# Altium PCB car_template 2021V3.PcbDoc
Units mm, origin at the board's own origin, x right, y up, seen from the top; angles counter-clockwise.
Board outline 64 x 85 mm, 4 copper layers (Top Side, Ground Plane, Power Plane, Bottom Side), stack 0.844 mm thick; 109 components, 84 nets, 330 pads, 13 vias.
Unrouted connection lines stored in the file: 162.
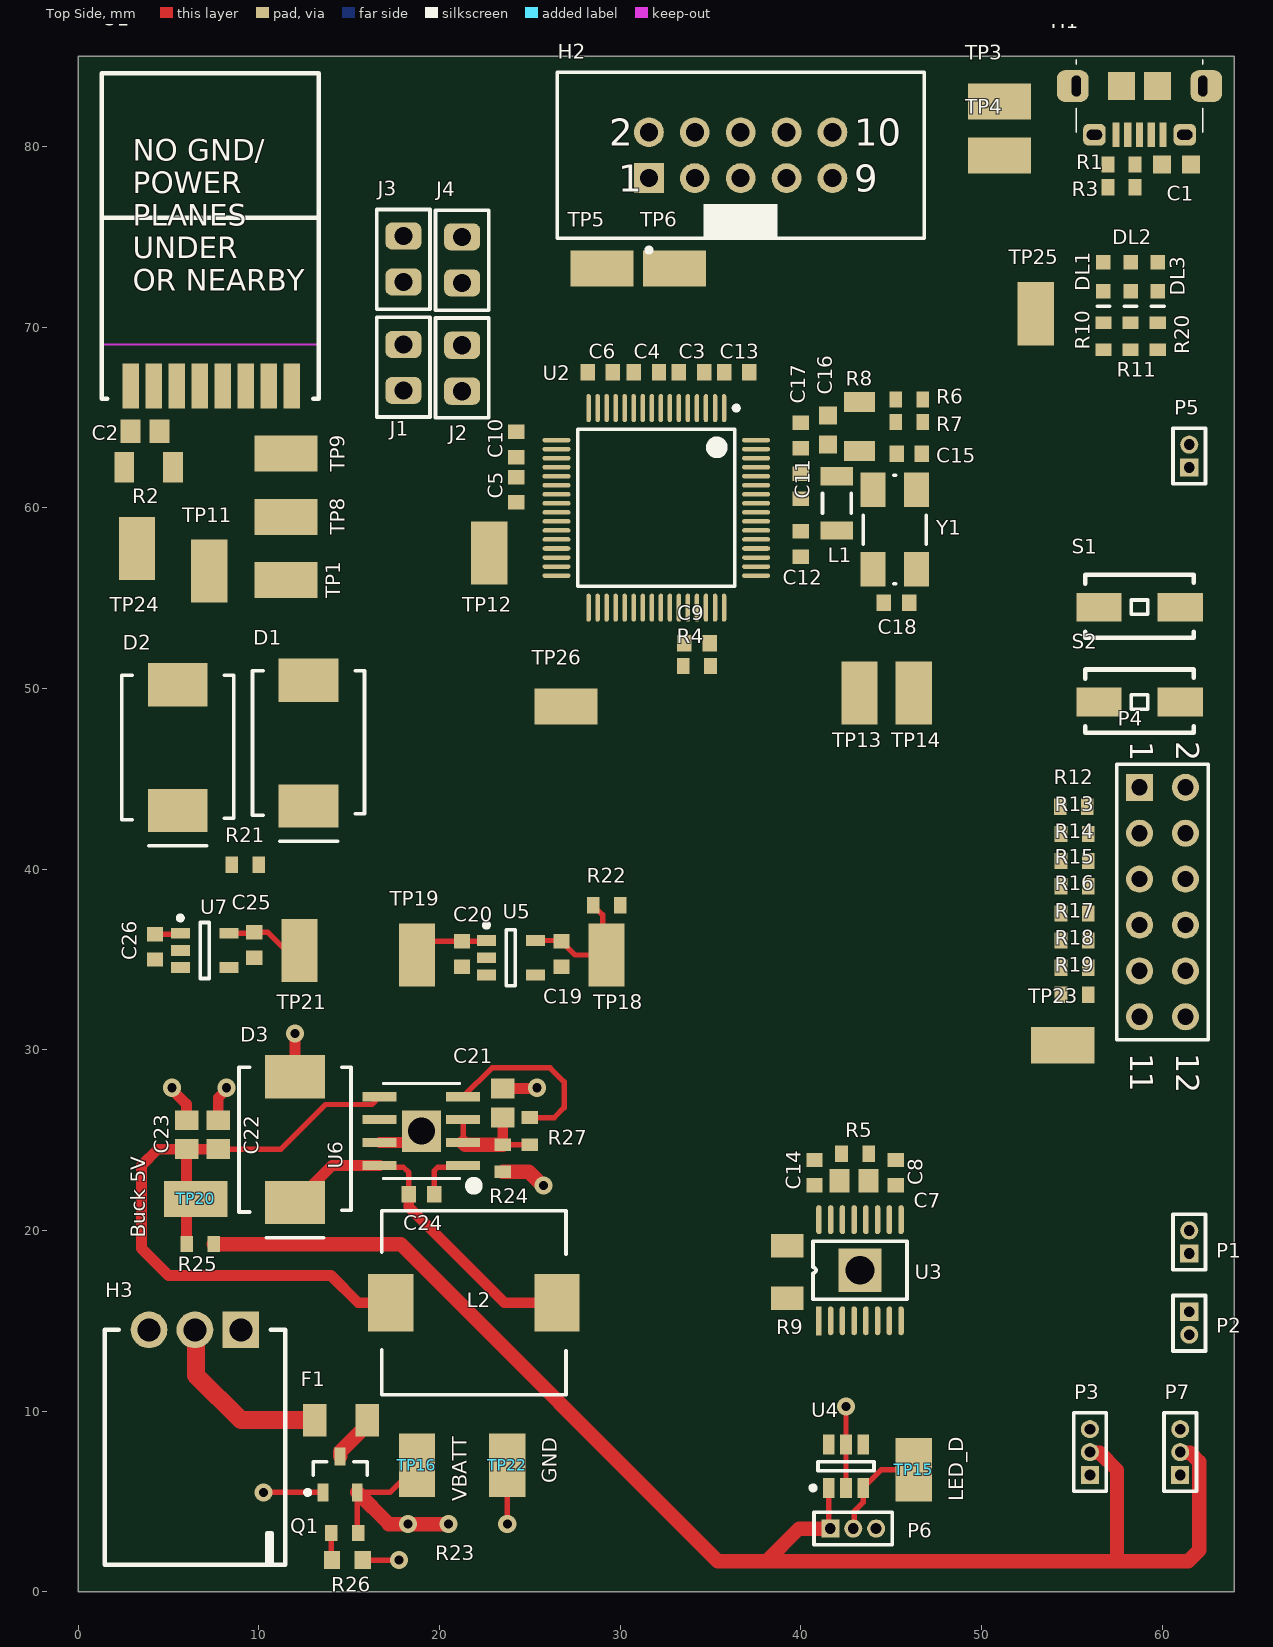
[diagram p0: Top Side view]
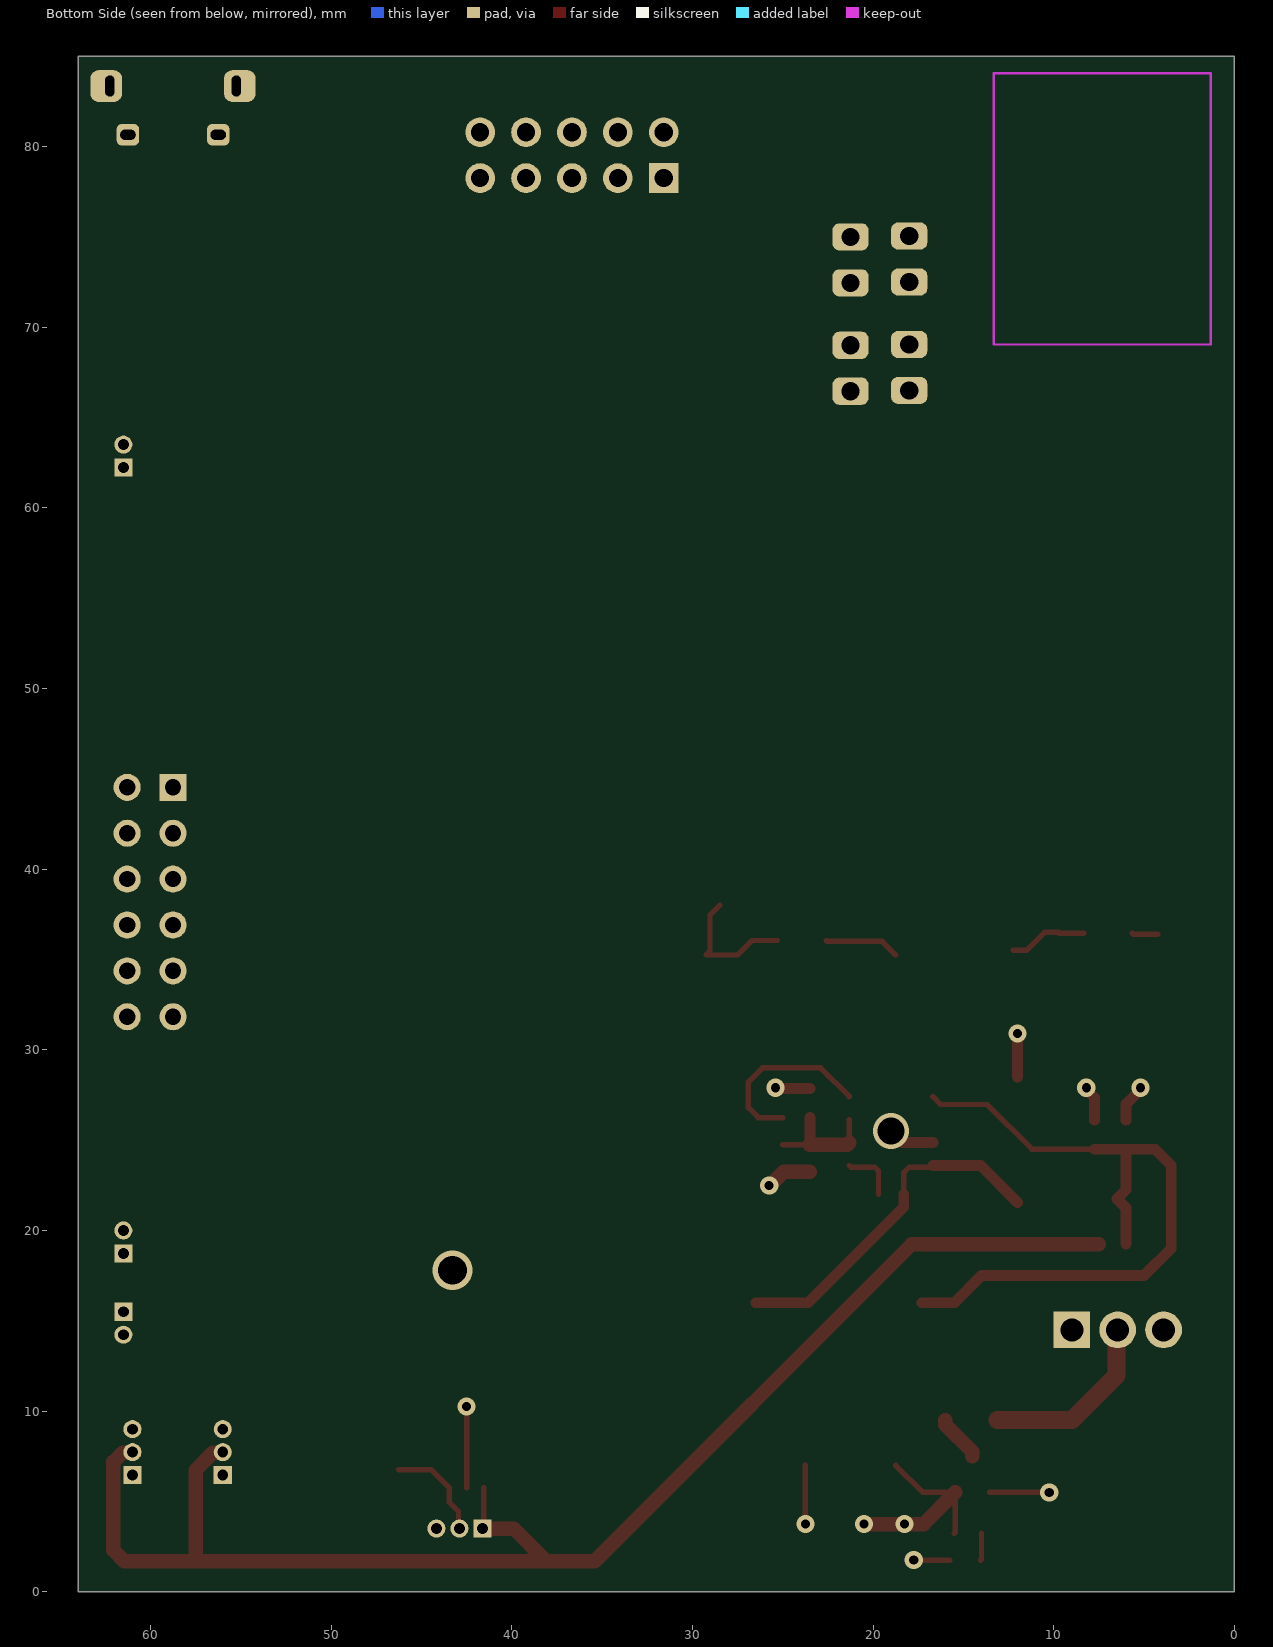
[diagram p1: Bottom Side view, seen from below]
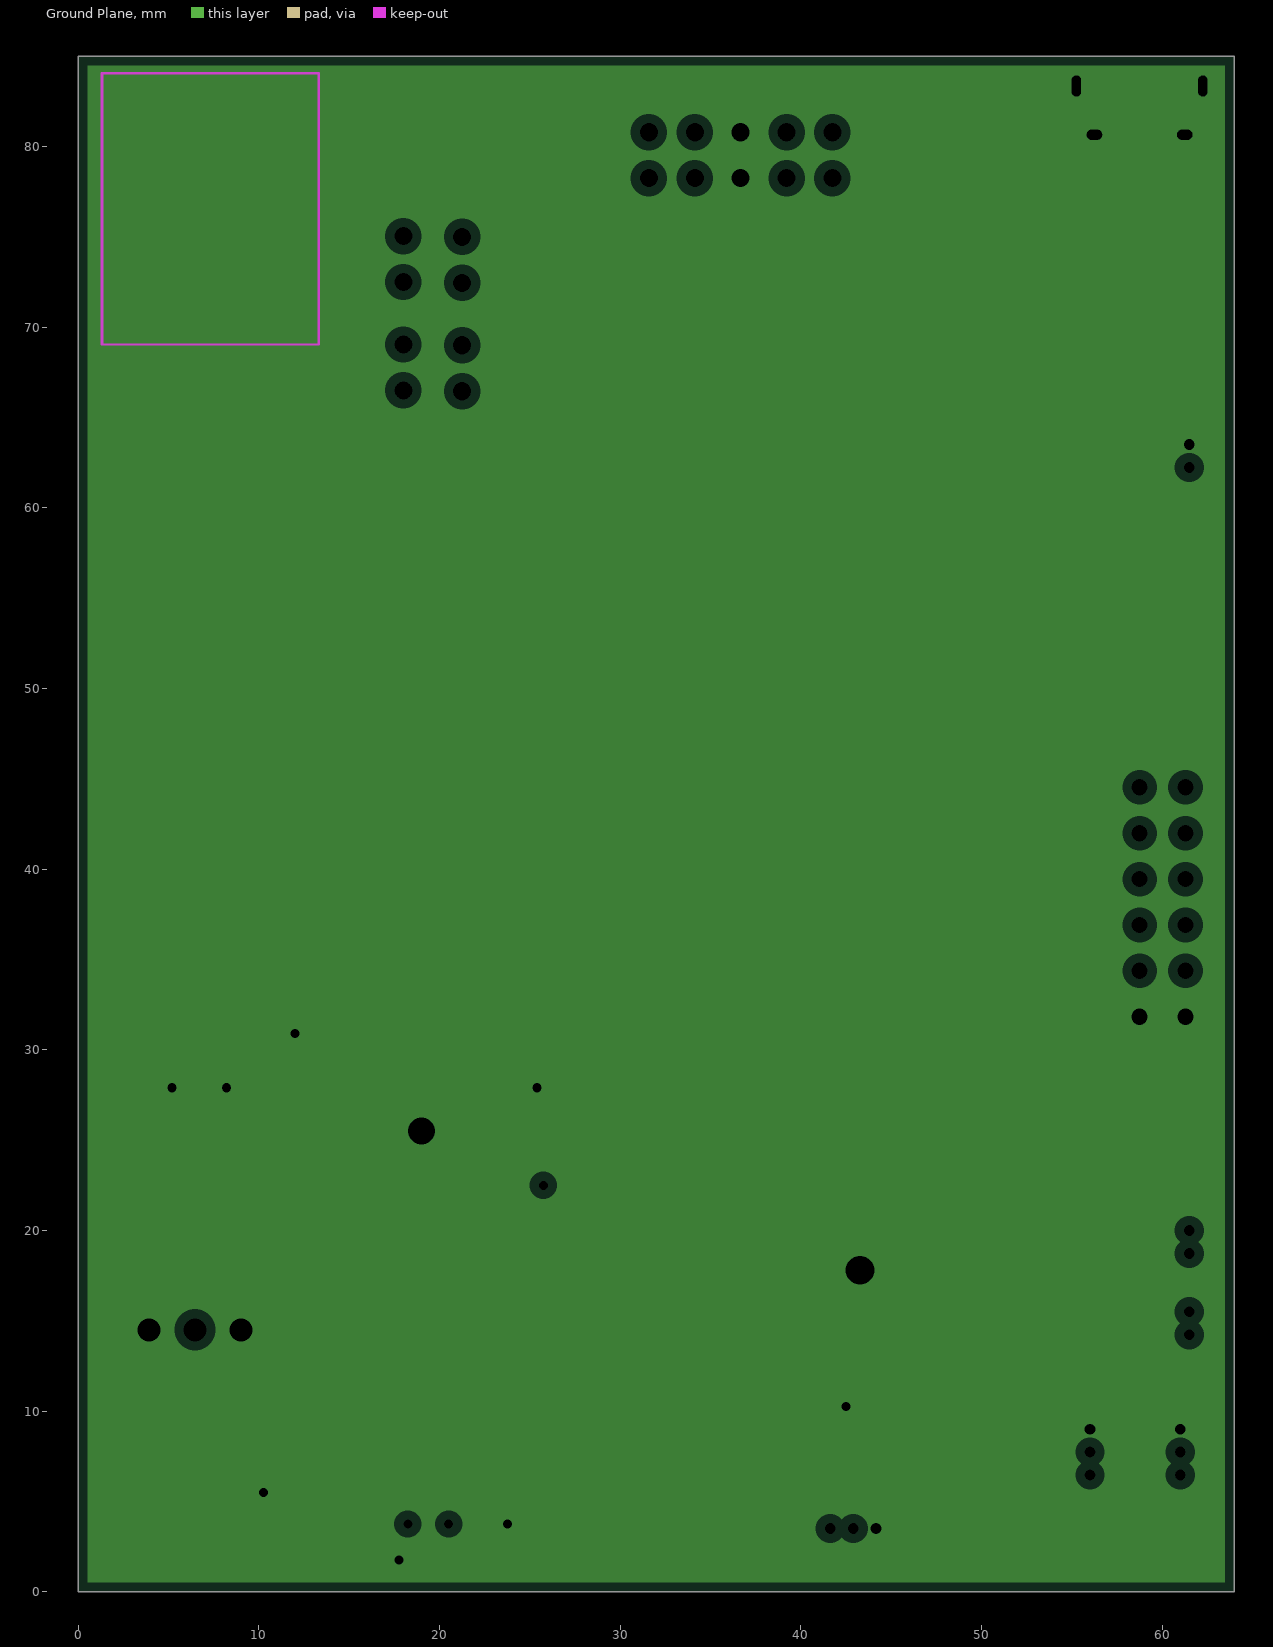
[diagram p2: Ground Plane, clearances drawn from the general rule]
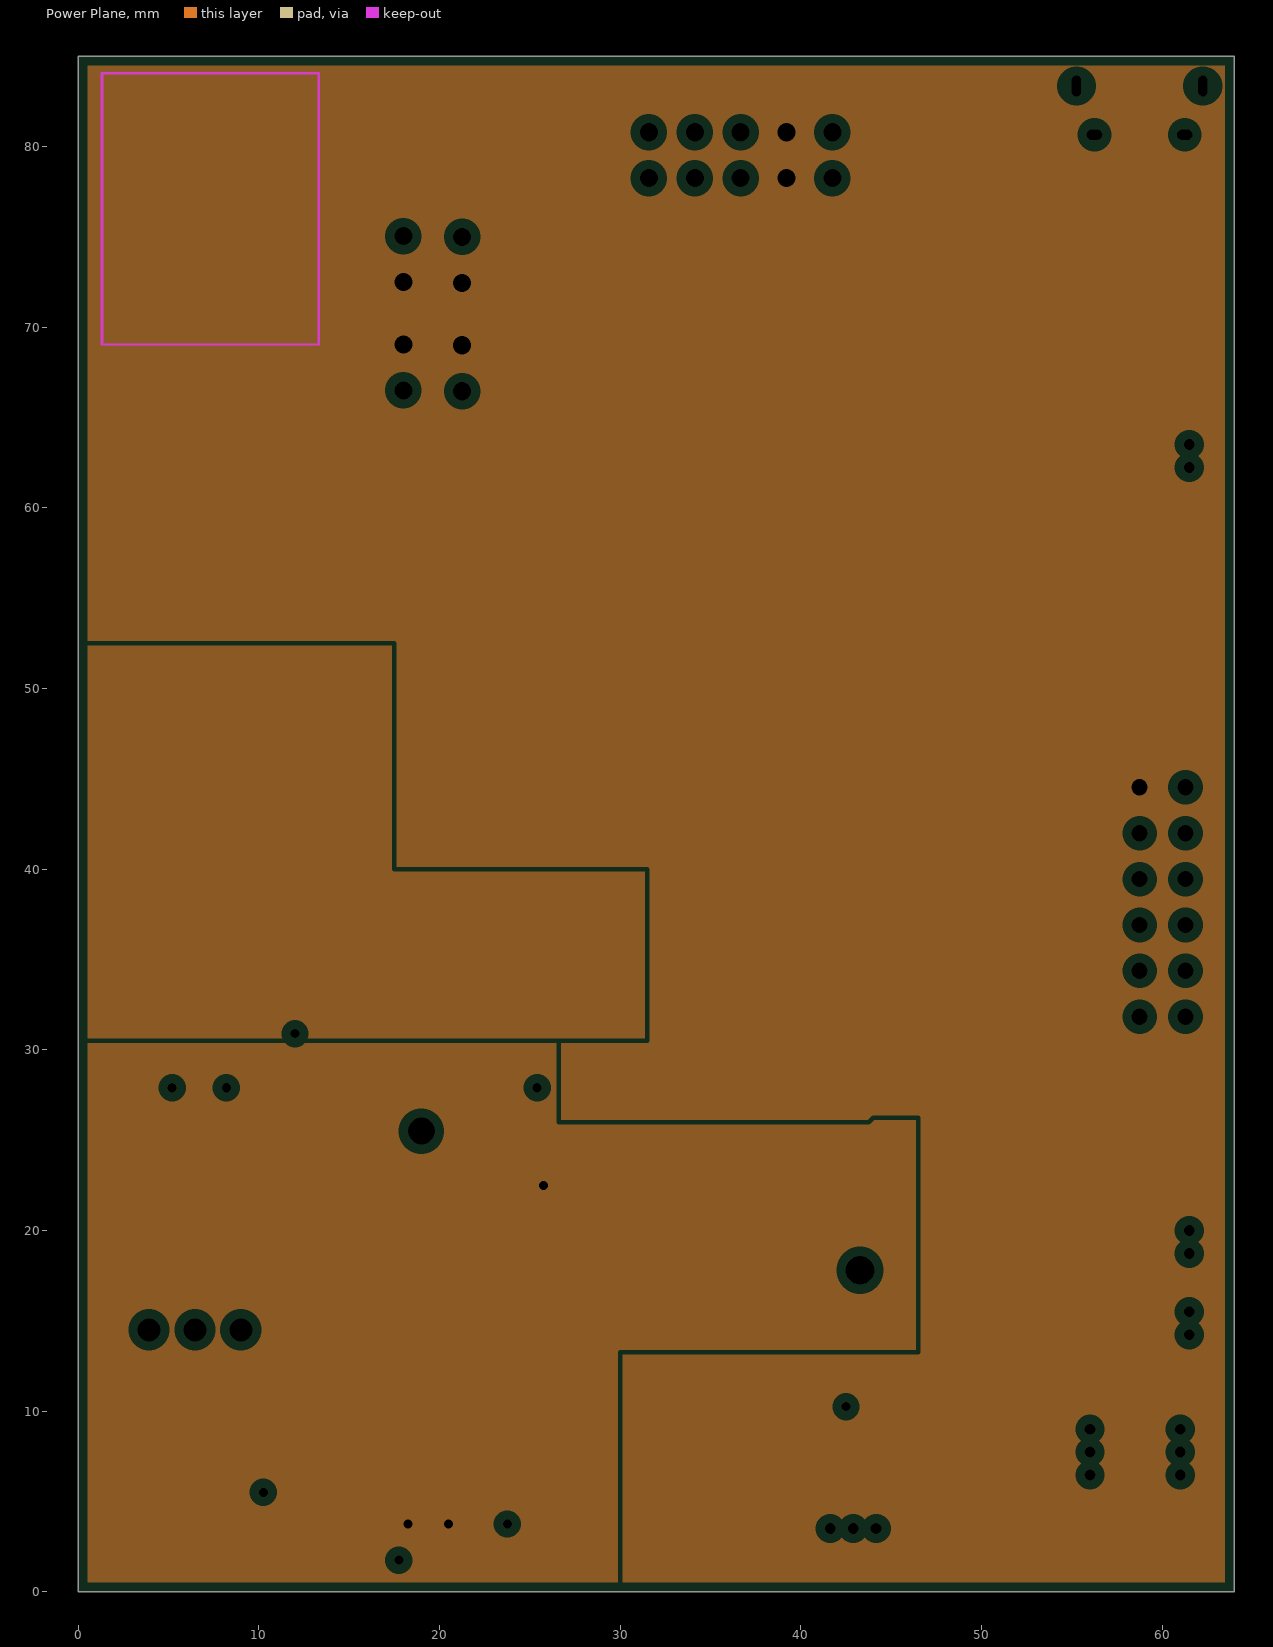
[diagram p3: Power Plane, clearances drawn from the general rule]

## Layer stack, top to bottom
Top Solder: solder mask 0.0102, Solder Resist, Dk 3.5
Top Side: signal copper 0.0356
Dielectric 1: core 0.32, FR-4, Dk 4.8
Ground Plane: plane copper 0.036, net GND
Dielectric 3: prepreg 0.127, Dk 4.2
Power Plane: plane copper 0.036, net 3V3
Dielectric 4: core 0.254, Dk 4.2
Bottom Side: signal copper 0.0356
Bottom Solder: solder mask 0.0102, Solder Resist, Dk 3.5

## Board outline
0,85 64,85 64,0 0,0 0,85

## Design rules (kind name [scope] priority, off if disabled: settings)
BoardOutlineClearance [All] p1: gap=0.5 ignorepadtopadclearanceinfootprint=FALSE
Clearance Min_Clearance_Circuit_Labs [All] p1: gap=0.15 ignorepadtopadclearanceinfootprint=FALSE except(0: Arc-Hole Track-Hole SMDPad-Hole THPad-Hole Via-Hole Fill-Hole Poly-Hole Region-Hole Text-Hole)
DiffPairsRouting [All] p1: maxlimit=0.254 minlimit=0.254 mostfreqgap=0.254 toplayer_minwidth=0.381 toplayer_maxwidth=0.381 toplayer_prefwidth=0.381 bottomlayer_minwidth=0.381 bottomlayer_maxwidth=0.381 bottomlayer_prefwidth=0.381 maxuncoupledlength=12.7
FanoutControl Fanout_BGA [IsBGA] p1 off: bgadir=Out bgaviamode=Centered fanoutstyle=Auto fanoutdirection=Alternating viagrid=0.025 // Fanout_BGA (Default Rule)
HoleSize [All] p1: absolutevalues=TRUE maxlimit=10 minlimit=0.3 maxpercent=80.000 minpercent=20.000
MinimumAnnularRing [All] p1: minimumring=0.1
MinimumSolderMaskSliver [All] p1: minsoldermaskwidth=0.1
NetAntennae [All] p1: netantennaetolerance=1
PasteMaskExpansion [All] p1 off: expansion=0.2
PlaneClearance [All] p1: clearance=0.508
PlaneConnect [All] p1: planeconnectstyle=Relief reliefexpansion=0.508 reliefentries=4 reliefconductorwidth=0.254 reliefairgap=0.254
PolygonConnect [All] p1: connectstyle=Relief reliefconductorwidth=0.254 reliefentries=4 polygonreliefangle="90 Angle" airgapwidth=0.254
RoutingVias [All] p1: holewidth=0.5 width=1 viastyle="Through Hole" minholewidth=0.3 minwidth=0.6 maxholewidth=1 maxwidth=2
SMDNeckDown [All] p1 off: percent=50.000
SMDToCorner [All] p1: distance=98425
SMDToPlane [All] p1: distance=1968504
SilkToSolderMaskClearance SilkscreenOverComponentPads [IsPad] p1: minsilkscreentomaskgap=0.254 clearancetoexposedcopper=TRUE
SolderMaskExpansion [All] p1: expansion=0.102
ViasUnderSMD [All] p1: allowed=FALSE
Width [All] p1: maxlimit=2 minlimit=0.15 preferedwidth=0.3
21 further rules are at their usual default settings.

## Classes and differential pairs
component class "Power Management": C19 C20 C21 C22 C23 C24 C25 C26 D1 D2 D3 F1 H3 L2 Q1 R21 R22 R23 R24 R25 R26 R27 TP16 TP18 TP19 TP20 TP21 TP22 TP23 TP24 TP25 TP26 U5 U6 U7
component class MCU: C1 C2 C3 C4 C5 C6 C7 C8 C9 C10 C11 C12 C13 C14 C15 C16 C17 C18 DL1 DL2 DL3 H1 H2 J1 J2 J3 J4 L1 P1 P2 P3 P4 P5 P6 P7 R1 R2 R3 R4 R5 R6 R7 R8 R9 R10 R11 R12 R13 R14 R15 R16 R17 R18 R19 R20 S1 S2 TP1 TP3 TP4 TP5 TP6 TP8 TP9 TP11 TP12 TP13 TP14 TP15 U1 U2 U3 U4 Y1
differential pair D: +D_P -D_N

## Components (designator, comment, footprint, x,y, rotation, side; value= is the part's Value field where it differs from the comment)
C1 "4.7uF" CAPC1608N 60.8,79 r180 top
C2 "10uF" CAPC2012L 3.7,64.25 r180 top
C3 "100nF" CAPC1608L 33.95,67.5 r180 top
C4 "100nF" CAPC1608L 31.45,67.5 r180 top
C5 "100nF" CAPC1608L 24.25,63.5 r270 top
C6 "100nF" CAPC1608L 28.9,67.5 r180 top
C7 "10uF" CAPC2012L 42.95,22.75 r0 top
C8 "10nF" CAPC1608L 45.25,23.2 r90 top
C9 "100nF" CAPC1608L 34.25,52.5 r180 top
C10 "100nF" CAPC1608L 24.25,61 r90 top
C11 "100nF" CAPC1608L 40,61.2 r270 top
C12 "100nF" CAPC1608L 40,58 r270 top
C13 "100nF" CAPC1608L 36.45,67.5 r0 top
C14 "2.2uF" CAPC1608L 40.75,23.2 r90 top
C15 "27pF" CAPC1608L 46,63 r0 top
C16 "4.7uF" CAPC1608N 41.5,64.3 r270 top
C17 "100nF" CAPC1608L 40,64 r270 top
C18 "27pF" CAPC1608L 45.3,54.75 r0 top
C19 "1uF" CAPC1608L 26.75,35.3 r90 top
C20 "1uF" CAPC1608L 21.25,35.3 r90 top
C21 "10uF" CAPC2012L 23.5,27.05 r270 top
C22 "33uF" CAPC2012L 7.75,25.3 r270 top
C23 "33uF" CAPC2012L 6,25.3 r270 top
C24 "100nF" CAPC1608L 19,22 r180 top
C25 "1uF" CAPC1608L 9.75,35.8 r90 top
C26 "1uF" CAPC1608L 4.25,35.7 r90 top
D1 "VS-30BQ015-M3/9AT" SMC 12.75,46.975 r270 top
D2 "VS-30BQ015-M3/9AT" SMC 5.5,46.725 r270 top
D3 "VS-30BQ015-M3/9AT" SMC 12,25.025 r270 top
DL1 "Yellow" WL-SMCW0603 56.75,72 r90 top
DL2 "Blue" WL-SMCW0603 58.25,72 r90 top
DL3 "Red" WL-SMCW0603 59.75,72 r90 top
F1 "5A" RESC3216N 14.55,9.5 r0 top
H1 "JS_USB_MICRO_B" FCI_USB_10118194-0001LF 58.75,84.8 r180 top
H2 "Header 5X2 Vert" IDC2.54-V10D 36.67,79.52 r0 top
H3 "Battery In" BATT_HEADER_3POS 6.46,14.5 r180 top
J1 "100Mil Jumper" JMP2.54 18,66.5 r90 top
J2 "100Mil Jumper" JMP2.54 21.25,66.456 r90 top
J3 "100Mil Jumper" JMP2.54 18,75.044 r270 top
J4 "100Mil Jumper" JMP2.54 21.25,75 r270 top
L1 "1A max, Idc 0.3R," INDC3216L 42,60.25 r270 top
L2 "IND 5.2UH 6A" INDUCTOR5u2 21.9,16 r180 top
P1 "Motor 1" MHDR1X2 61.5,18.73 r90 top
P2 "Motor 2" MHDR1X2 61.5,15.5 r270 top
P3 "Servo 1" MHDR1X3 56,6.46 r90 top
P4 "Header 6X2" HDR2X6 58.75,44.53 r270 top
P5 "Bumper" MHDR1X2 61.5,62.23 r90 top
P6 "LED Strip" MHDR1X3 41.63,3.5 r0 top
P7 "Servo 2" MHDR1X3 61,6.46 r90 top
Q1 "SSM3J328R,LF" SOT23_L 14.5,6.5 r90 top
R1 "27K" RESC1608L 57.75,79 r0 top
R2 "1R" RESC3216L 3.9,62.25 r0 top
R3 "47K" RESC1608L 57.75,77.75 r180 top
R4 "0R" RESC1608L 34.25,51.25 r0 top
R5 "0R" RESC1608L 43,24.25 r0 top
R6 "27R" RESC1608L 46,66 r180 top
R7 "27R" RESC1608L 46,64.75 r180 top
R8 "1R" RESC3216L 43.25,64.5 r90 top
R9 "25mR" RESC3216N 39.25,17.7 r270 top
R10 "1K" RESC1608L 56.75,69.5 r90 top
R11 "100R" RESC1608L 58.25,69.5 r270 top
R12 "750R" RESC1608L 55.1,43.45 r0 top
R13 "750R" RESC1608L 55.15,41.95 r180 top
R14 "750R" RESC1608L 55.15,40.45 r0 top
R15 "750R" RESC1608L 55.15,39.05 r180 top
R16 "750R" RESC1608L 55.15,37.55 r0 top
R17 "750R" RESC1608L 55.15,36.05 r180 top
R18 "750R" RESC1608L 55.15,34.55 r0 top
R19 "750R" RESC1608L 55.15,33.05 r180 top
R20 "1K" RESC1608L 59.75,69.5 r90 top
R21 "0R" RESC1608L 9.25,40.25 r180 top
R22 "0R" RESC1608L 29.25,38 r180 top
R23 "82K" RESC1608L 14.75,3.25 r0 top
R24 "0R" RESC1608L 23.5,24 r270 top
R25 "0R" RESC1608L 6.75,19.25 r180 top
R26 "47K" RESC1608N 14.9,1.75 r180 top
R27 "100K" RESC1608L 25,25.5 r90 top
S1 "EVQPNF05M" EVQPNF05M 58.75,54.5 r0 top
S2 "EVQPNF05M" EVQPNF05M 58.75,49.25 r0 top
TP1 "SCK" TP_1206 11.5,56 r180 top value=TP
TP3 "D_N" TP_1206 51,82.5 r180 top value=TP
TP4 "D_P" TP_1206 51,79.5 r0 top value=TP
TP5 "SWCLK" TP_1206 29,73.25 r0 top value=TP
TP6 "SWDIO" TP_1206 33,73.25 r0 top value=TP
TP8 "MOSI" TP_1206 11.5,59.5 r180 top value=TP
TP9 "MISO" TP_1206 11.5,63 r180 top value=TP
TP11 "IRQ" TP_1206 7.25,56.5 r270 top value=TP
TP12 "nRST" TP_1206 22.75,57.5 r90 top value=TP
TP13 "3V3" TP_1206 43.25,49.75 r90 top value=TP
TP14 "Erase" TP_1206 46.25,49.75 r90 top value=TP
TP15 "LED_D" TP_1206 46.25,6.75 r90 top value=TP
TP16 "VBATT" TP_1206 18.75,7 r90 top value=TP
TP18 "3V3" TP_1206 29.25,35.25 r90 top value=TP
TP19 "5V" TP_1206 18.75,35.25 r90 top value=TP
TP20 "Buck 5V" TP_1206 6.5,21.75 r180 top value=TP
TP21 "3V3_RADIO" TP_1206 12.25,35.5 r90 top value=TP
TP22 "GND" TP_1206 23.75,7 r90 top value=TP
TP23 "GND" TP_1206 54.5,30.25 r180 top value=TP
TP24 "GND" TP_1206 3.25,57.75 r90 top value=TP
TP25 "GND" TP_1206 53,70.75 r90 top value=TP
TP26 "GND" TP_1206 27,49 r180 top value=TP
U1 "nRF24 SMD" NRF24 1.314,66.05 r0 top
U2 "ATSAM4S8BA-ANR" LQFP64_L 32,60 r270 top locked
U3 "DRV8833" HTSOP16 41,15 r90 top locked
U4 "SN74LVC1T45" SOT23-6_N 42.5,6.95 r90 top
U5 "CAT6219-330TDGT3" SOT95P280X145-5N 23.95,35.1 r0 top
U6 "ADP2302ARDZ-5.0 BUCK" RD_8_1 19,25.5 r180 top locked value=Value
U7 "CAT6219-330TDGT3" SOT95P280X145-5N 7,35.5 r0 top
Y1 "12MHz" 6.0X3.5-4 45.2,58.8 r90 top

## Footprints (in the part's own frame and the unit in brackets; to place one, negate y for a bottom-side part, rotate by r counter-clockwise, add the part's x,y. Pads: shape width x height; smd on the part's side, far side on the other; paste and mask are expansions set on the pad)
6.0X3.5-4 [mm] "4 SMD 6.0X3.5 mm No Lead Crystal"
  rect 1.9x1.4 smd: 1(-2.2,-1.2) 2(2.2,-1.2) 3(2.2,1.2) 4(-2.2,1.2)
  silkscreen extent -3,-1.75 3,1.75, body extent -3,-1.75 3,1.75, height 1.2
BATT_HEADER_3POS [mil]
  rect 80x80 hole 50: 1(-100,0)
  round 80 hole 50: 2(0,0) 3(100,0)
  silkscreen extent -197,0 197,512
CAPC1608L [mm] "Chip Capacitor, Body 1.6x0.8mm, IPC High Density"
  rect 0.8x0.9 smd: 1(-0.7,0) 2(0.7,0)
  body extent -0.87,-0.48 0.87,0.48, height 0.85
CAPC1608N [mm] "Chip Capacitor, Body 1.6x0.8mm, IPC Medium Density"
  rect 1x1 smd: 1(-0.8,0) 2(0.8,0)
  body extent -0.87,-0.48 0.87,0.48, height 0.85
CAPC2012L [mm] "Chip Capacitor, Body 2.0x1.3mm, IPC High Density"
  rect 1.1x1.3 smd: 1(-0.8,0) 2(0.8,0)
  body extent -1.1,-0.72 1.1,0.72, height 1.1
EVQPNF05M [mm] "Panansonic light touch SMD push button switch"
  rect 2.5x1.6 smd: 1(-2.25,0) 2(2.25,0)
  silkscreen extent -3,-1.7 3,1.8, body extent -3,-1.7 3,1.8, height 5
FCI_USB_10118194-0001LF [mm] "Micro USB B Type Receptacle"
  rect 0.4x1.35 smd mask+0.07: 1(-1.3,4.15) 2(-0.65,4.15) 3(0,4.15) 4(0.65,4.15) 5(1.3,4.15)
  rrect50% 1.75x1.75 hole 0.5 slot 1.15 at 90 deg copper offset -0.2,0 paste+0 mask+0.1: 6(-3.5,1.45)
  rrect50% 1.25x1.2 hole 0.55 slot 0.85 at 0 deg: 6(-2.5,4.15) 6(2.5,4.15)
  rect 1.5x1.55 smd: 6(-1,1.45) 6(1,1.45)
  rrect50% 1.75x1.75 hole 0.5 slot 1.15 at 90 deg copper offset 0.2,0 paste+0 mask+0.1: 6(3.5,1.45)
  silkscreen extent -3.5,0 3.5,4
HDR2X6 [mm] "Connector; Header; 6x2 Position"
  rect 1.5x1.5 hole 0.9: 1(0,0)
  round 1.5 hole 0.9: 2(0,2.54) 3(2.54,0) 4(2.54,2.54) 5(5.08,0) 6(5.08,2.54) 7(7.62,0) 8(7.62,2.54) 9(10.16,0) 10(10.16,2.54) 11(12.7,0) 12(12.7,2.54)
  silkscreen extent -1.27,-1.27 13.97,3.81
HTSOP16 [mm]
  rect 1.6x0.3 smd: 1(0,0)
  oval 1.6x0.3 smd: 2(0,-0.65) 3(0,-1.3) 4(0,-1.95) 5(0,-2.6) 6(0,-3.25) 7(0,-3.9) 8(0,-4.55) 9(5.6,-4.55) 10(5.6,-3.9) 11(5.6,-3.25) 12(5.6,-2.6) 13(5.6,-1.95) 14(5.6,-1.3) 15(5.6,-0.65) 16(5.6,0)
  rect 2.4x2.4 smd paste-0.5: 17(2.8,-2.275)
  silkscreen extent 1.2,-4.88 4.4,0.33
IDC2.54-V10D [mm] "Connector; IDC, Low Profile Male Header, Thru-Hole; 10 Position; Vertical; Pitch 2.54 mm; Body 20.32 x 9.2 x 9.45 mm (LxWxH)"
  rect 1.65x1.65 hole 1: 1(-5.08,-1.27)
  round 1.65 hole 1: 2(-5.08,1.27) 3(-2.54,-1.27) 4(-2.54,1.27) 5(0,-1.27) 6(0,1.27) 7(2.54,-1.27) 8(2.54,1.27) 9(5.08,-1.27) 10(5.08,1.27)
  silkscreen extent -10.16,-5.37 10.16,4.6, body extent -10.16,-4.6 10.16,4.6, height 9.45
INDC3216L [mm] "Chip Inductor, Body 3.2x1.6mm, IPC High Density"
  rect 1x1.8 smd: 1(-1.5,0) 2(1.5,0)
  silkscreen extent -0.55,-0.8 0.55,0.8, body extent -1.75,-0.95 1.75,0.95, height 1.9
INDUCTOR5u2 [mm]
  rect 2.5x3.2 smd: 1(-4.6,0) 2(4.6,0)
  silkscreen extent -5.1,-5.1 5.1,5.1
JMP2.54 [mm] "Jumper Change over 2.54mm"
  rrect50% 1.5x2 hole 1: 1(0,0) 2(2.544,0)
  silkscreen extent -1.47,-1.47 4.05,1.47, body extent -1.43,-1.43 4.05,1.43, height 8.45
LQFP64_L [mm] "Thin QFP, 64-Leads, Body 10x10mm, Pitch 0.5mm, IPC High Density"
  oval 1.55x0.25 smd mask+0.07: 1(-5.525,3.75) 2(-5.525,3.25) 3(-5.525,2.75) 4(-5.525,2.25) 5(-5.525,1.75) 6(-5.525,1.25) 7(-5.525,0.75) 8(-5.525,0.25) 9(-5.525,-0.25) 10(-5.525,-0.75) 11(-5.525,-1.25) 12(-5.525,-1.75) 13(-5.525,-2.25) 14(-5.525,-2.75) 15(-5.525,-3.25) 16(-5.525,-3.75) 33(5.525,-3.75) 34(5.525,-3.25) 35(5.525,-2.75) 36(5.525,-2.25) 37(5.525,-1.75) 38(5.525,-1.25) 39(5.525,-0.75) 40(5.525,-0.25) 41(5.525,0.25) 42(5.525,0.75) 43(5.525,1.25) 44(5.525,1.75) 45(5.525,2.25) 46(5.525,2.75) 47(5.525,3.25) 48(5.525,3.75)
  oval 0.25x1.55 smd mask+0.07: 17(-3.75,-5.525) 18(-3.25,-5.525) 19(-2.75,-5.525) 20(-2.25,-5.525) 21(-1.75,-5.525) 22(-1.25,-5.525) 23(-0.75,-5.525) 24(-0.25,-5.525) 25(0.25,-5.525) 26(0.75,-5.525) 27(1.25,-5.525) 28(1.75,-5.525) 29(2.25,-5.525) 30(2.75,-5.525) 31(3.25,-5.525) 32(3.75,-5.525) 49(3.75,5.525) 50(3.25,5.525) 51(2.75,5.525) 52(2.25,5.525) 53(1.75,5.525) 54(1.25,5.525) 55(0.75,5.525) 56(0.25,5.525) 57(-0.25,5.525) 58(-0.75,5.525) 59(-1.25,5.525) 60(-1.75,5.525) 61(-2.25,5.525) 62(-2.75,5.525) 63(-3.25,5.525) 64(-3.75,5.525)
  silkscreen extent -5.65,-4.35 4.35,4.55, body extent -5,-5 5,5, height 1.6
MHDR1X2 [mm] "Connector; Header; 2 Position"
  rect 1x1 hole 0.6: 1(0,0)
  round 1 hole 0.6: 2(1.27,0)
  silkscreen extent -0.9,-0.9 2.17,0.9
MHDR1X3 [mm] "Connector; Header; 3 Position"
  rect 1x1 hole 0.6: 1(0,0)
  round 1 hole 0.6: 2(1.27,0) 3(2.54,0)
  silkscreen extent -0.9,-0.9 3.44,0.9
NRF24 [mm]
  rect 0.9x2.5 smd: 1(1.6,0.7) 2(2.871,0.7) 3(4.143,0.7) 4(5.414,0.7) 5(6.686,0.7) 6(7.957,0.7) 7(9.229,0.7) 8(10.5,0.7)
  Keep-Out Layer lines w0.1: 0,3 12,3
  Keep-Out Layer lines w0.15: 0,3 0,18 12,18 12,3
  silkscreen extent 0,0 12,18
RD_8_1 [mil]
  rect 74x20 smd paste+0 mask+0: 1(-91,75) 2(-91,25) 3(-91,-25) 4(-91,-75) 5(91,-75) 6(91,-25) 7(91,25) 8(91,75)
  rect 84.65x90 smd paste-44.5 mask+0: EPAD(0,0)
  silkscreen extent -118,-104 84,123, body extent 0,0 10,10, height 10
RESC1608L [mm] "Chip Resistor, Body 1.6x0.8mm, IPC High Density"
  rect 0.7x0.9 smd: 1(-0.75,0) 2(0.75,0)
  body extent -0.85,-0.48 0.85,0.48, height 0.9
RESC1608N [mm] "Chip Resistor, Body 1.6x0.8mm, IPC Medium Density"
  rect 0.9x1 smd: 1(-0.85,0) 2(0.85,0)
  body extent -0.85,-0.48 0.85,0.48, height 0.6
RESC3216L [mm] "Chip Resistor, Body 3.1x1.6mm, IPC High Density"
  rect 1.1x1.7 smd: 1(-1.35,0) 2(1.35,0)
  body extent -1.68,-0.87 1.68,0.87, height 2.54
RESC3216N [mm] "Chip Resistor, Body 3.2x1.6mm, IPC Medium Density"
  rect 1.3x1.8 smd: 1(-1.45,0) 2(1.45,0)
  body extent -1.68,-0.87 1.68,0.87, height 0.71
SMC [mm] "DO-214-AB/SMC; 2 C-Bend Leads; Body 7.9 x 5.9 mm, inc. leads (LxW)"
  rect 2.4x3.3 smd: 1(-3.475,0) 2(3.475,0)
  silkscreen extent -4,-3.1 5.43,3.1
SOT23-6_N [mm]
  rect 1.1x0.65 smd: 1(-1.2,0.95) 2(-1.2,0) 3(-1.2,-0.95) 4(1.2,-0.95) 5(1.2,0) 6(1.2,0.95)
  silkscreen extent -1.32,-1.55 0.25,1.95, body extent -0.9,-1.55 0.9,1.55, height 1.45
SOT23_L [mm] "SOT23, 3-Leads, Body 2.9x1.3mm, Pitch 0.95mm, Lead Span 2.3mm, IPC High Density"
  rect 1x0.6 smd: 1(-1,0.95) 2(-1,-0.95) 3(1,0)
  silkscreen extent -1.12,-1.5 0.7,1.92, body extent -0.7,-1.5 0.7,1.5, height 1.1
SOT95P280X145-5N [mm] "SOT23, 5-Leads, Body 2.90x2.80mm, Pitch 0.95mm, IPC Medium Density"
  rect 1.05x0.6 smd: 1(-1.35,0.95) 2(-1.35,0) 3(-1.35,-0.95) 4(1.35,-0.95) 5(1.35,0.95)
  silkscreen extent -1.47,-1.55 0.25,1.92, body extent -0.87,-1.52 0.87,1.53, height 1.45
TP_1206 [mm] "Test Point Pad"
  rect 3.5x2 smd: 1(0,0)
  body extent -1.62,-0.85 1.63,0.8, height 2
WL-SMCW0603 [mm] "2.4 x 0.8 x 0.7mm LED"
  rect 0.8x0.8 smd: 1(0,0) 2(1.6,0)
  silkscreen extent -0.85,-0.35 -0.85,0.35

## Part data
C1 C16: library part CC_4.7uF_0603, "CAP CER 4.7uF X5R +-20%  10V 0603", Max Voltage=10V, Code_IPC=2012[0805], Note="Footprint corresponds to dimensions for bulk cassette packaging. This case size has tightened tolerances.", PackageReference=0805, Storage Location="PCB Assembly WS", Supplier="ECE Dept"
C2 C7 C21: library part CC_10uF_16V_0805, "CAP CER 10uF X5R 16V 0805", Manufacturer="Samsung Electro-Mechanics", Manufacturer Part Number=CL21A106KOQNNWE, Max Voltage=16V, Operating Temperature="-55°C ~ 85°C", Package / Case="0805 (2012 Metric)", Ratings=-, Supplier Part Number 1=1276-2894-1-ND, Temperature Coefficient=X5R, Tolerance=±10%, Applications="General Purpose", Category=Capacitors, Code_IPC=2012[0805], ComponentLink1Description=http://www.samsungsem.com/kr/support/product-search/mlcc/CL21A106KOQNNWE.jsp, ComponentLink1URL=http://www.samsungsem.com/kr/support/product-search/mlcc/CL21A106KOQNNWE.jsp, Features=-, Height - Seated (Max)=-, Lead Spacing=-, Lead Style=-, Mounting Type="Surface Mount, MLCC", Note="Footprint corresponds to dimensions for bulk cassette packaging. This case size has tightened tolerances.", Notification="Current market demand for these product types have resulted in fluctuating and extending lead times. Lead times may differ.", PackageReference=0805, Packaging="Cut Tape (CT)", Part Status=Active, Pricing 1="1=0.35, 10=0.25, 100=0.1178, 500=0.08254, 1000=0.06831 (NZD)", RoHS="RoHS Compliant", Size / Dimension="0.079\" L x 0.049\" W (2.00mm x 1.25mm)", Stock 1=20000, Supplier 1=Digi-Key, Thickness (Max)="0.055\" (1.40mm)", Voltage - Rated=16V
C3 C4 C5 C6 C9 C10 C11 C12 C13 C17 C24: library part CC_100nF_0603, "CAP CER 100nF X7R +-10% 50V 0603", Code_IPC="1608 [0603]", PackageReference=0603, Storage Location="PCB Assembly WS", Supplier="ECE Dept"
C8: library part CC_10nF_0603, "CAP CER 10nF X7R +-10% 50V 0603", Code_IPC="1608 [0603]", PackageReference=0603, Storage Location="PCB Assembly WS", Supplier="ECE Dept"
C14: library part CC_2.2uF_0603, "CAP CER 2.2uF X5R +-20% 10V 0603", Max Voltage=10V, Code_IPC="1608 [0603]", PackageReference=0603, Storage Location="PCB Assembly WS", Supplier="ECE Dept"
C15 C18: library part CC_27pF_0603, "CAP CER 27pF NPO/COG +-5% 50V 0603", Code_IPC="1608 [0603]", PackageReference=0603, Storage Location="PCB Assembly WS", Supplier="ECE Dept"
C19 C20 C25 C26: library part CC_1uF_0603, "CAP CER 1uF Y5V -20% +80% 16V 0603", Max Voltage=16V, Code_IPC="1608 [0603]", PackageReference=0603, Storage Location="PCB Assembly WS", Supplier="ECE Dept"
C22 C23: library part CC_33uF_6V3_0805, "CAP CER 33uF X5R 6V3 0805", Manufacturer="TDK Corporation", Manufacturer Part Number=C2012X5R0J336M125AC, Operating Temperature="-55°C ~ 85°C", Package / Case="0805 (2012 Metric)", Ratings=-, Supplier Part Number 1=445-5986-1-ND, Temperature Coefficient=X5R, Tolerance=±20%, Voltage - Rated=6.3V, Applications="General Purpose", Category=Capacitors, ComponentLink1Description=https://product.tdk.com/info/en/catalog/datasheets/mlcc_commercial_general_en.pdf, ComponentLink1URL=https://product.tdk.com/info/en/catalog/datasheets/mlcc_commercial_general_en.pdf, Failure Rate=-, Features="Low ESL", Height - Seated (Max)=-, Lead Spacing=-, Lead Style=-, Mounting Type="Surface Mount, MLCC", Notification="Current market demand for these product types have resulted in fluctuating and extending lead times. Lead times may differ.", Packaging="Cut Tape (CT)", Part Status=Active, Pricing 1="1=1.65, 10=1.262, 100=0.9023, 500=0.6985, 1000=0.60149 (NZD)", RoHS="RoHS Compliant", Size / Dimension="0.079\" L x 0.049\" W (2.00mm x 1.25mm)", Stock 1=20000, Supplier 1=Digi-Key, Thickness (Max)="0.057\" (1.45mm)"
D1 D2 D3: library part DS_VS-30BQ015-M3, "DIODE, SCHOTTKY, 3A, 15V, DO-214AB / SMC", Average Rectified Current=3A, Forward Voltage=350mV, Manufacturer="Vishay Semiconductors", Max Forward Surge Current (Ifsm)=650A, Max Reverse Voltage (DC)=15V, Peak Reverse Current=4mA, Supplier Part Number=VS-30BQ015-M3/9AT-ND, Supplier Part Number 1=VS-30BQ015-M3/9ATGIDKR-ND, ComponentLink1Description=https://datasheet.ciiva.com/36181/vs-30bq015-m3-9at-36181258.pdf, ComponentLink1URL=https://datasheet.ciiva.com/36181/vs-30bq015-m3-9at-36181258.pdf, Manufacturer Part Number=VS-30BQ015-M3/9AT, Supplier=Digi-Key, Supplier 1=Digi-Key, Supplier 2=Element14, Supplier Part Number 2=2628288
DL1: library part DL_150060YS75000, "LED Yellow 120mcd 0603 SMD", Forward Current If=30, Forward Voltage=2, Manufacturer="WURTH ELEKTRONIK", Manufacturer Part Number=150060YS75000, Supplier Part Number 1=2322074, LED Colour=Yellow, LED Mounting=SMD, Lens Shape=Rectangular, Luminous Intensity=120, Storage Location="PCB Assembly WS", Supplier="ECE Dept", Supplier 1=Farnell, Viewing Angle=140°, Wavelength Typ=590
DL2: library part DL_150060BS75000, "LED Blue 270mcd 0603 SMD", Forward Current If=30, Forward Voltage=3.2, Manufacturer="WURTH ELEKTRONIK", Manufacturer Part Number=150060BS75000, Supplier Part Number 1=2322069, LED Colour=Blue, Luminous Intensity=270, Pricing="1=0.3844, 50=0.3252, 100=0.2957, 500=0.2365 (NZD)", Storage Location="PCB Assembly WS", Supplier="ECE Dept", Supplier 1=Farnell, Viewing Angle=120°, Wavelength Typ=470
DL3: library part DL_150060RS75000, "LED Red 250mcd 0603 SMD", Forward Current If=30, Forward Voltage=2, Manufacturer="WURTH ELEKTRONIK", Manufacturer Part Number=150060RS75000, Supplier Part Number 1=2322071, LED Colour=Red, LED Mounting=SMD, Lens Shape=Rectangular, Luminous Intensity=250, Storage Location="PCB Assembly WS", Supplier="ECE Dept", Supplier 1=Farnell, Viewing Angle=140°, Wavelength Typ=625
F1: library part FS_Fuse_5.0A, "Fuse 5.0A Fast Acting 1206 SMD", Case/Package=1206, Case Code (Metric)=3216, DC Cold Resistance=19mR, Manufacturer="Bel TRP", Manufacturer Part Number=C1F5, Max Operating Temperature=125°C, Min Operating Temperature=-55°C, Supplier Part Number 1=507-1886-1-ND, Voltage Rating=125V, Voltage Rating (DC)=63V, Approvals=CE,cURus, Case Code (Imperial)=1206, ComponentLink1Description=http://www.farnell.com/datasheets/2571625.pdf, ComponentLink1URL=http://www.farnell.com/datasheets/2571625.pdf, ComponentLink2Description=http://belfuse.com/pdfs/C1F.pdf, ComponentLink2URL=http://belfuse.com/pdfs/C1F.pdf, ComponentLink3Description=http://www.mouser.com/ds/2/643/C1F-594910.pdf, ComponentLink3URL=http://www.mouser.com/ds/2/643/C1F-594910.pdf, ComponentLink4Description=https://belfuse.com/resources/StewartConnector/C1F.pdf, ComponentLink4URL=https://belfuse.com/resources/StewartConnector/C1F.pdf, Contact Plating=Nickel,Tin, Current Rating=5A, Fuse Type="Board Mount (Cartridge Style Excluded)", Length=0.126inch, Mount="Surface Mount", Number of Pins=2, Packaging="Tape and Reel", Pricing 1="1=0.32, 5=0.312, 10=0.298, 50=0.2662, 100=0.2479, 250=0.22032, 500=0.1836, 1000=0.17442 (USD)", Stock 1=725, Supplier 1=Digi-Key, Supplier 2=Element14, Supplier Part Number 2=2848595, Voltage Rating (AC)=125V, Width=0.062inch
H1: library part JS_USB_MICRO_B_SMT, "CONN USB MICRO B RECPT SMT R/A", Manufacturer=FCI, Manufacturer Part Number=10118194-0001LF, Supplier Part Number 1=609-4618-1-ND, Features="Shielded, Solder Retention", Gender=Receptacle, Mounting Type="Surface Mount, Right Angle, Horizontal", Number of Contacts=5, Specifications="USB 2.0", Supplier 1=Digi-Key
H2: library part JA_HDR_IDC_5X2_VERT, "IDC Header, 2,54mm, 10-Pin, Vert", Supplier Part Number 1=1096985, Storage Location="ECE Dept Store", Supplier="ECE Dept", Supplier 1=Farnell
H3: library part Battery_HEADER_3pin, "3Pin Header 2.54mm spacing"
J1 J2 J3 J4: library part TP_JUMPER, "2.54mm Jumper Thru Hole", Supplier Part Number 1=1097975, No. of Positions=2, No. of Rows=1, Pitch Spacing=2.54, Storage Location="ECE$ Store", Supplier="ECE Dept", Supplier 1=Farnell
L1: library part IN_Ferrite-Bead, "Ferrite Bead, Rdc 0.3R, Z100MHZ 600R, Imax 1A, SMD 1206", DC Current Rating=1, DC Resistance Max=0.08, Ferrite Case Style="1206 ^3216 Metric]", Frequency Range="50MHz to 1", Impedance Tolerance="± 25%", Manufacturer=FAIR-RITE, Manufacturer Part Number=2512066017Y1, Supplier Part Number 1=1612060, Ferrite Mounting=SMD, Impedance=600, Manufacturer PN=2512066017Y1, Storage Location="PCB Assembly WS", Supplier="ECE Dept", Supplier 1=Farnell
L2: library part CDRH104RNP-5R2NC, "FIXED IND 5.2UH 6A 22 MOHM SMD", Current - Saturation=5.6A, DC Resistance (DCR)="22 mOhm Max", Frequency - Self Resonant=-, Manufacturer="Sumida America Components Inc.", Operating Temperature="-40°C ~ 100°C", Package / Case=Nonstandard, Supplier Part Number 1=308-2280-1-ND, Tolerance=±30%, Category="Inductors, Coils, Chokes", ComponentLink1Description=http://products.sumida.com/products/pdf/CDRH104R.pdf, ComponentLink1URL=http://products.sumida.com/products/pdf/CDRH104R.pdf, Height - Seated (Max)="0.157\" (4.00mm)", Manufacturer Part Number=CDRH104RNP-5R2NC, Material - Core=Ferrite, Mounting Type="Surface Mount", Packaging="Cut Tape (CT)", Part Status=Active, Pricing 1="1=2.9, 10=2.678, 100=1.8743, 500=1.5173 (NZD)", Q @ Freq=-, Ratings=-, RoHS="RoHS Compliant", Shielding=Shielded, Size / Dimension="0.402\" L x 0.394\" W (10.20mm x 10.00mm)", Stock 1=3849, Supplier 1=Digi-Key, Supplier Device Package=-, Type=-
P1 P2 P5: library part MHDR1X2, "Header, 2-Pin", LatestRevisionDate=17-Jul-2002, LatestRevisionNote="Re-released for DXP Platform.", Publisher="Altium Limited"
P3 P6 P7: library part MHDR1X3, "Header, 3-Pin", LatestRevisionDate=17-Jul-2002, LatestRevisionNote="Re-released for DXP Platform.", Publisher="Altium Limited"
P4: "Header, 6-Pin, Dual row", LatestRevisionDate=17-Jul-2002, LatestRevisionNote="Re-released for DXP Platform.", Publisher="Altium Limited"
Q1: library part TM_SSM3J328R, "MOSFET P-CH 20V 6A SOT23-3", Case/Package=SOT-23-3, Continuous Drain Current (ID)=6A, Drain to Source Breakdown Voltage=-20V, Drain to Source Resistance=47.4mR, Drain to Source Voltage (Vdss)=20V, Gate to Source Voltage (Vgs)=8V, Input Capacitance=840pF, Input Capacitance (Ciss) @ Vds="840pF @ 10V", Manufacturer=Toshiba, Max Operating Temperature=150°C, Max Power Dissipation=1W, Min Operating Temperature=-55°C, Package / Case="SOT-23-3 Flat Leads", Package Quantity=3000, Power Dissipation=2W, Supplier Device Package=SOT-23F, Supplier Part Number=SSM3J328RLFDKR-ND, ComponentLink1Description=https://datasheet.ciiva.com/11158/ssm3j328r-datasheet-en-20140301-11158652.pdf, ComponentLink1URL=https://datasheet.ciiva.com/11158/ssm3j328r-datasheet-en-20140301-11158652.pdf, Current - Continuous Drain (Id) @ 25° C=6A, Element Configuration=Single, FET Feature="Logic Level Gate, 1.5V Drive", FET Type="MOSFET P-Channel, Metal Oxide", Gate Charge (Qg) @ Vgs="12.8nC @ 4.5V", Manufacturer Part Number=SSM3J328R,LF, Mount="Surface Mount", Number of Channels=1, Number of Elements=1, Number of Pins=3, Packaging="Tape and Reel", Power - Max=1W, Pricing="1=0.79, 10=0.658, 25=0.5772, 100=0.4939, 250=0.42836, 500=0.36284, 1000=0.27972 (NZD)", Radiation Hardening=No, Rds On Max=29.8mR, Storage Location="PCB Assembly WS", Supplier=Digi-Key, Supplier 1=Digi-Key, Supplier Part Number 1=SSM3J328RLFDKR-ND, Turn-Off Delay Time=107ns, Turn-On Delay Time=32ns, Vgs(th) (Max) @ Id="1V @ 1mA"
R1 R3: library part RS_27K, "RES 27K OHM 1/10W 5% 0603 SMD", Storage Location="PCB Assembly WS", Supplier="ECE Dept"
R2 R8: library part RT_1R, "RES 1R OHM 1/4W 5% 1206 SMD", Storage Location="PCB Assembly WS", Supplier="ECE Dept"
R4 R5 R21 R22 R24 R25: library part RS_0R0, "RES 0.0 OHM 1/10W 5% 0603 SMD", Storage Location="PCB Assembly WS", Supplier="ECE Dept"
R6 R7: library part RS_27R, "RES 27 OHM 1/10W 5% 0603 SMD", Storage Location="PCB Assembly WS", Supplier="ECE Dept"
R9: library part RS_25mR, "0.5W 1206 25mR Resistor", Power=0.5W
R10 R20: library part RS_1K, "RES 1.0K OHM 1/10W 5% 0603 SMD", Storage Location="PCB Assembly WS", Supplier="ECE Dept"
R11: library part RS_100R, "RES 100 OHM 1/10W 5% 0603 SMD", Storage Location="PCB Assembly WS", Supplier="ECE Dept"
R12 R13 R14 R15 R16 R17 R18 R19: library part RS_750R, "RES 750 OHM 1/10W 5% 0603 SMD", Storage Location="PCB Assembly WS", Supplier="ECE Dept"
R23: library part RS_82K, "RES 82.0K OHM 1/10W 5% 0603 SMD", Storage Location="PCB Assembly WS", Supplier="ECE Dept"
R26: library part RS_47K, "RES 47.0K OHM 1/10W 5% 0603 SMD", Storage Location="PCB Assembly WS", Supplier="ECE Dept"
R27: library part RS_100K, "RES 100K OHM 1/10W 5% 0603 SMD", Storage Location="PCB Assembly WS", Supplier="ECE Dept"
S1 S2: library part WS_EVQPNF05M, "Panasonic 6 x 3.5mm SMD Light Touch Switch Type SMD", Manufacturer=Panasonic, Supplier Part Number 1=2079481, Manufacturer PN=EVQPNF05M, PackageDescription="6.0 x 3.5 mm", Storage Location="PCB Assembly WS", Supplier="ECE Dept", Supplier 1=Farnell, Supplier 2=Digi-Key, Supplier Part Number 2=P13598SCT-ND
TP1 TP3 TP4 TP5 TP6 TP8 TP9 TP11 TP12 TP13 TP14 TP15 TP16 TP18 TP19 TP20 TP21 TP22 TP23 TP24 TP25 TP26: library part TP_1206, "Test-Point 3.3x1.6x2.1mm SMD", Manufacturer="Harwin Inc", Manufacturer Part Number=S1751-46R, Supplier Part Number 1=952-1478-2-ND, Mounting Type="Surface Mount", Storage Location=ProtoPlace, Supplier="ECE Dept", Supplier 1=Digi-Key, Supplier 2=Farnell, Supplier Part Number 2=1826282, Type="PC Test Point"
U1: library part NRF24, "nRF24 SMD Module", Warning="No power planes near or under device"
U2: library part SE_ATSAM4S16BA-MU, "IC MCU 32BIT 512KB FLASH 64LQFP", Manufacturer=Atmel, Package / Case=64-LQFP, Supplier Part Number 1=ATSAM4S8BA-ANRCT-ND, Voltage - Supply (Vcc/Vdd)="1.62 V ~ 3.6 V", Code_JEDEC=MO-220VMMD-3, ComponentLink1Description="Manufacturer URL", ComponentLink1URL=http://www.atmel.com/, ComponentLink2Description="SAM4S Series Datasheet", ComponentLink2URL=http://www.atmel.com/dyn/resources/prod_documents/11100.pdf, ComponentLink3Description="SAM4S Series Summary", ComponentLink3URL=http://www.atmel.com/dyn/resources/prod_documents/11100S.pdf, Connectivity="I²C, IrDA, Memory Card, SPI, SSC, UART/USART, USB", Core Processor="ARM® Cortex®-M4", Core Size=32-Bit, Data Converters="A/D 11x12b, D/A 2x12b", Manufacturer Part Number=ATSAM4S8BA-ANR, Number of I/O=47, PackageDescription="64-Pin Quad Flat No-Lead (QFN) Sawn, 9 x 9 x 1.0 mm Body, 0.5 mm Pitch, Exposed Pad", PackageReference=64PS, PackageVersion="revJ, Jul-2007", Packaging="Cut Tape (CT)", Peripherals="Brown-out Detect/Reset, DMA, POR, PWM, WDT", Program Memory Size="512KB (512K x 8)", Program Memory Type=FLASH, RAM Size="128K x 8", Speed=120MHz, Supplier 1=Digi-Key
U3: "Dual H-Bridge Motor Driver 1.5A"
U4: "1.8V - 5V level converter"
U5 U7: library part SV_CAT6219-330TDGT3, "IC REG LIN 3.3V 500MA TSOT23-5", Base Part Number=CAT6219, Current - Output=500mA, Package / Case="SOT-23-5 Thin, TSOT-23-5", Supplier Device Package=TSOT-23-5, Supplier Part Number=CAT6219-330TDGT3CT-ND, Voltage - Input (Max)=5.5V, Voltage - Output (Min/Fixed)=3.3V, Voltage Dropout (Max)="0.5V @ 500mA", ComponentLink1Description=http://www.onsemi.com/pub/Collateral/CAT6219-D.PDF, ComponentLink1URL=http://www.onsemi.com/pub/Collateral/CAT6219-D.PDF, Manufacturer Part Number=CAT6219-330TDGT3, Supplier=Digi-Key, Supplier 1=Digi-Key
U6: library part ADP2302ARDZ-5.0-R7, "IC REG BUCK 5V 2A 8SOIC", Current - Output=2A, Frequency - Switching=700kHz, Supplier Part Number 1=ADP2302ARDZ-5.0-R7CT-ND, Voltage - Input (Max)=20V, Voltage - Output (Min/Fixed)=5V, Manufacturer_Part_Number=ADP2302ARDZ-5.0-R7, Output Type=Fixed, Supplier 1=Digi-Key, Type=DEV, Vendor="Analog Devices Inc"
Y1: library part XT_CRYSTAL_12MHz_18pF, "CRYSTAL 12MHZ 18PF 6X3.5mm SMD", ESR (Equivalent Series Resistance)="60 Ohm", Frequency Stability=±50ppm, Frequency Tolerance=±30ppm, Load Capacitance=18pF, Manufacturer="CTS-Frequency Controls", Manufacturer Part Number=406C35D12M00000, Operating Mode=Fundamental, Operating Temperature="-20°C ~ 70°C", Package / Case="4-SMD, No Lead (DFN, LCC)", Supplier Part Number 1=CTX855CT-ND, Frequency=12MHz, Height="0.047\" (1.20mm)", Mounting Type="Surface Mount", Size / Dimension="0.236\" L x 0.138\" W (6.00mm x 3.50mm)", Supplier 1=Digi-Key

## Via types
v1: diameter 1, hole 0.5, Top Side to Bottom Side, 11 vias
v2: diameter 2, hole 1.5, Top Side to Bottom Side, 1 vias
v3: diameter 2.2, hole 1.6, Top Side to Bottom Side, 1 vias

## Nets (pads, with @x,y where several pads share a name; then routed paths per layer and width w, separated by ;. In a path a pad name is that pad's centre, name@x,y a point inside that pad or via, vN(x,y) a via of type N, cw(c..) or ccw(c..) an arc to the next point about the centre after c; other vN are vias at no path point)
3V3: DL1.2 DL2.2 DL3.2 H2.7 H2.8 J1.2 J2.2 J3.2 J4.2 P4.1 R4.2 R22.1 TP13.1 U4.6
3V3_Radio: C25.2 R2.2 TP21.1 U7.5 | length 4.3
  Top Side w0.3: U7.5 9.7,36.45 C25.2 10.5,36.5 11.5,35.5 TP21.1
5V: C20.2 C26.2 P4.2 R21.1 TP19.1 U5.1 U5.3 U7.1 U7.3 | length 5.6
  Top Side w0.3: C26.2 5.6,36.4 U7.1 ; TP19.1 19.5,36 C20.2 22.55,36 U5.1
5V_BUCK: D2.1 P3.2 P6.1 P7.2 R25.1 U4.1 | length 81.7
  Top Side w0.3: U4.1 41.55,3.58 P6.1
  Top Side w0.8: R25.1 17.85,19.25 35.4,1.7 38.1,1.7 ; P6.1 39.9,3.5 38.1,1.7 ; P3.2 56.038,7.692 56.546,7.692 57.5,6.738 57.5,1.7 ; P7.2 61.038,7.692 61.546,7.692 62.05,7.188 62.05,2.3 61.45,1.7 57.5,1.7 ; 38.1,1.7 57.5,1.7
BUMPER_SENSE: P5.1 U2.34
CE_RF24: U1.3 U2.19
CH1_RF24: J1.1 U2.52
CH2_RF24: J2.1 U2.42
CH3_RF24: J3.1 U2.41
CH4_RF24: J4.1 U2.38
CSN_RF24: U1.4 U2.20
D_N: H1.2 R7.1 TP3.1
D_P: H1.3 R6.1 TP4.1
GND: C1.1 C2.1 C3.1 C4.2 C5.1 C6.2 C7.1 C9.1 C10.2 C11.1 C12.2 C13.1 C14.2 C15.1 C17.1 C18.1 C19.1 C20.1 C21.1 C22.1 C23.1 C25.1 C26.1 D3.1 H1.5 H1.6 H2.5 H2.6 H3.1 H3.3 P3.3 P4.11 P4.12 P5.2 P6.3 P7.3 Q1.1 R3.1 R8.1 R9.1 R26.1 S1.2 S2.2 TP22.1 TP23.1 TP24.1 TP25.1 TP26.1 U1.2 U2.2 U2.17 U2.46 U2.60 U3.13 U3.17 U4.2 U4.5 U5.2 U6.7 U6.EPAD U7.2 | length 23.6
  Top Side w0.3: v1(10.25,5.5) Q1.1 ; R26.1 v1@17.25,1.75 ; v1(23.75,3.75) TP22.1 ; U4.2 U4.5 v1(42.5,10.25)
  Top Side w0.6: v1(5.2,27.9) 5.2,27.792 6,26.992 C23.1 ; C22.1 7.75,27.342 8.2,27.792 v1(8.2,27.9) ; D3.1 v1(12,30.9) ; U6.7 18.365,24.865 v2(19,25.5) ; C21.1 25.35,27.85 v1(25.4,27.9)
  other v1: 17.75,1.75
  other v3: 43.275,17.8
HBR1_BAC: U2.48 U3.15
HBR1_FOR: U2.15 U3.16
HBR2_BAC: U2.47 U3.10
HBR2_FOR: U2.4 U3.9
HBR_SLEEP: U2.32 U3.1
IRQ_RF24: TP11.1 U1.8 U2.23
LED_STRIP: U2.28 U4.4
LOW_BAT_LED: R20.1 U2.44
MISO: TP9.1 U1.7 U2.27
MOSI: TP8.1 U1.6 U2.22
NetC2_2: C2.2 R2.1 U1.1
NetC3_2: C3.2 C5.2 C9.2 C11.2 C13.2 R4.1 U2.1 U2.7 U2.18 U2.45 U2.58
NetC4_1: C4.1 C6.1 C10.1 C12.1 L1.2 U2.8 U2.12 U2.24 U2.54
NetC7_2: C7.2 C8.2 R5.2 U3.12
NetC8_1: C8.1 U3.11
NetC14_1: C14.1 U3.14
NetC15_2: C15.2 U2.62 Y1.3
NetC16_1: C16.1 R8.2
NetC16_2: C16.2 C17.2 L1.1 U2.64
NetC18_2: C18.2 U2.61 Y1.1
NetC19_2: C19.2 R22.2 TP18.1 U5.5 | length 7.3
  Top Side w0.3: U5.5 26.7,36.05 C19.2 27.5,35.25 TP18.1 29.027,35.473 29.027,37.473 R22.2
NetC21_2: C21.2 R24.1 R27.1 U6.2 U6.3 | length 6.5
  Top Side w0.3: U6.2 U6.3 ; R24.1 R27.1
  Top Side w0.6: R24.1 C21.2
  Top Side w0.8: U6.2 21.426,24.75 R24.1
NetC22_2: C22.2 C23.2 L2.2 R25.2 TP20.1 U6.5 | length 40.1
  Top Side w0.3: C22.2 11.217,24.5 13.691,26.974 16.258,26.974 U6.5
  Top Side w0.6: R25.2 6,21.25 TP20.1 6,22.25 C23.2 ; C22.2 C23.2 ; L2.2 15.5,16 14,17.5 5,17.5 3.5,19 3.5,23.6 4.4,24.5 C23.2
NetC24_1: C24.1 U6.1 | length 3
  Top Side w0.3: C24.1 19.7,23.3 19.9,23.5 21.216,23.5 U6.1
NetC24_2: C24.2 D3.2 L2.1 U6.8 | length 19.6
  Top Side w0.3: U6.8 16.784,23.5 18,23.5 18.3,23.2 C24.2
  Top Side w0.6: D3.2 14.045,23.595 U6.8 ; C24.2 18.3,21.3 23.6,16 L2.1
NetD1_2: D1.2 D2.2 R21.2
NetDL1_1: DL1.1 R10.2
NetDL2_1: DL2.1 R11.2
NetDL3_1: DL3.1 R20.2
NetF1_1: F1.1 H3.2 | length 10.2
  Top Side w1: H3.2 6.516,14.444 6.516,11.984 9,9.5 F1.1
NetF1_2: F1.2 Q1.3 | length 2.6
  Top Side w0.8: Q1.3 14.5,7.75 16,9.25 F1.2
NetP1_1: P1.1 U3.2
NetP1_2: P1.2 U3.4
NetP2_1: P2.1 U3.7
NetP2_2: P2.2 U3.5
NetP4_3: P4.3 R12.2
NetP4_4: P4.4 R13.1
NetP4_5: P4.5 R14.2
NetP4_6: P4.6 R15.1
NetP4_7: P4.7 R16.2
NetP4_8: P4.8 R17.1
NetP4_9: P4.9 R18.2
NetP4_10: P4.10 R19.1
NetP6_2: P6.2 TP15.1 U4.3 | length 5.7
  Top Side w0.3: P6.2 42.95,3.55 42.95,4.45 43.45,4.95 U4.3 44.45,6.75 TP15.1
NetR6_2: R6.2 U2.57
NetR7_2: R7.2 U2.56
NetR9_2: R9.2 U3.3 U3.6
NetR27_2: R27.2 U6.4 | length 10.1
  Top Side w0.3: U6.4 22.906,29 26.124,29 26.9,28.224 26.9,26.8 26.35,26.25 R27.2
NetTP14_1: TP14.1 U2.55
nRST: H2.1 S1.1 TP12.1 U2.39
PA9: R13.2 U2.30
PA10: R15.2 U2.29
PA19: R12.1 U2.13
PA20: R14.1 U2.16
PA21: R16.1 U2.11
PA22: R18.1 U2.14
PB13: R17.2 U2.59
PB14: R19.2 U2.63
SCK: TP1.1 U1.5 U2.21
SERVO_1: P3.1 U2.25
SERVO_2: P7.1 U2.9
SLEEP_BTN: S2.1 U2.31
STATUS0_LED: R10.1 U2.36
STATUS1_LED: R11.1 U2.43
SWCLK: H2.2 TP5.1 U2.53
SWDIO: H2.4 TP6.1 U2.51
USB_DETECT: R1.1 R3.2 U2.35
VBATT: Q1.2 R5.1 R23.2 R24.2 TP16.1 | length 14.5
  Top Side w0.3: R23.2 15.45,3.3 Q1.2 17.25,5.5 TP16.1
  Top Side w0.8: Q1.2 17.2,3.75 v1(18.25,3.75) v1(20.5,3.75) ; R24.2 24.946,23.25 25.696,22.5 v1(25.75,22.5)
VBATT_MEAS: R23.1 R26.2 U2.10 | length 1.5
  Top Side w0.3: R23.1 14,1.8 R26.2
VBUS: C1.2 D1.1 H1.1 R1.2
pads on no net: H1.4 H2.3 H2.9 H2.10 U2.3 U2.5 U2.6 U2.26 U2.33 U2.37 U2.40 U2.49 U2.50 U3.8 U5.4 U6.6 U7.4 Y1.2 Y1.4

## Polygon pours and split planes (outlines as drawn)
GND on Ground Plane (split plane): 63.49,0.51 0.51,0.51 0.51,84.49 63.49,84.49
5V on Power Plane (split plane): 17.371,50 17.371,40 17.38,39.95 17.408,39.908 17.45,39.88 17.5,39.871 31.371,39.871 31.371,30.629 0.51,30.629 0.51,52.371 17.371,52.371
VBATT on Power Plane (split plane): 26.471,26 26.48,25.95 26.508,25.908 26.55,25.88 26.6,25.871 43.75,25.871 43.8,25.88 43.842,25.908 44.054,26.121 46.371,26.121 46.371,18 46.371,13.379 30,13.379 29.95,13.37 29.908,13.342 29.88,13.3 29.871,13.25 29.871,0.51 0.51,0.51 0.51,30.371 26.471,30.371
3V3 on Power Plane (split plane): 63.49,0.51 30.129,0.51 30.129,13.121 46.5,13.121 46.55,13.13 46.592,13.158 46.62,13.2 46.629,13.25 46.629,18 46.629,26.25 46.62,26.3 46.592,26.342 46.55,26.37 46.5,26.379 44,26.379 43.95,26.37 43.908,26.342 43.696,26.129 26.729,26.129 26.729,30.371 31.5,30.371 31.55,30.38 31.592,30.408 31.62,30.45 31.629,30.5 31.629,40 31.62,40.05 31.592,40.092 31.55,40.12 31.5,40.129 17.629,40.129 17.629,50 17.629,52.5 17.62,52.55 17.592,52.592 17.55,52.62 17.5,52.629 0.51,52.629 0.51,84.49 63.49,84.49

## Other copper
Top Side:
  pour cut-out: 0,85 0,69 19.5,69 25,78.5 25,85
Power Plane (plane layer: these items are gaps in the copper):
  lines w0.254: 0,30.5 31.5,30.5 31.5,40 17.5,40 17.5,50 17.5,52.5 15,52.5 0,52.5 0,30.5 ; 0,30.5 26.6,30.5 26.6,26 31,26 43.75,26 44,26.25 46.5,26.25 46.5,18 46.5,13.25 30,13.25 30,0 0,0 0,30.5

## Silkscreen, mask and mechanical layers (free items; w line width, h text height)
Board Outline:
  the board outline again, w0.254

## Dimensions
0,86 to 64,86 on Mechanical 1
65,85 to 65,0 on Mechanical 1

## Text inside footprints (layer, text, board x,y; h text height)
H1: Mechanical 1 "PCB Edge" at 60.9,85.62 h0.52 r180
H2: Top Overlay "2" at 29.39,80.04 h1.5; Top Overlay "1" at 29.89,77.5 h1.5; Top Overlay "10" at 42.95,80.04 h1.5; Top Overlay "9" at 42.95,77.5 h1.5
P4: Top Overlay "12" at 60.782,29.798 h1.27 r270; Top Overlay "1" at 58.242,28.782 h1.27 r270; Top Overlay "1" at 58.242,29.798 h1.27 r270; Top Overlay "1" at 58.242,47.07 h1.27 r270; Top Overlay "2" at 60.782,47.07 h1.27 r270
U1: Top Overlay "NO GND/ / POWER / PLANES / UNDER / OR NEARBY" at 3.014,72.025 h1.2
U6: Mechanical 13 "*" at 20.93,24.344 h1.27 r180